# Altium PCB 2008_SablierElectronique_PCB.PcbDoc (part 1 of 2)
Units mm, origin at the board's own origin, x right, y up, seen from the top; angles counter-clockwise.
Board outline 133.25 x 150.25 mm, 2 copper layers (Top Layer, Bottom Layer), stack 1.586 mm thick; 184 components, 217 nets, 656 pads, 372 vias.
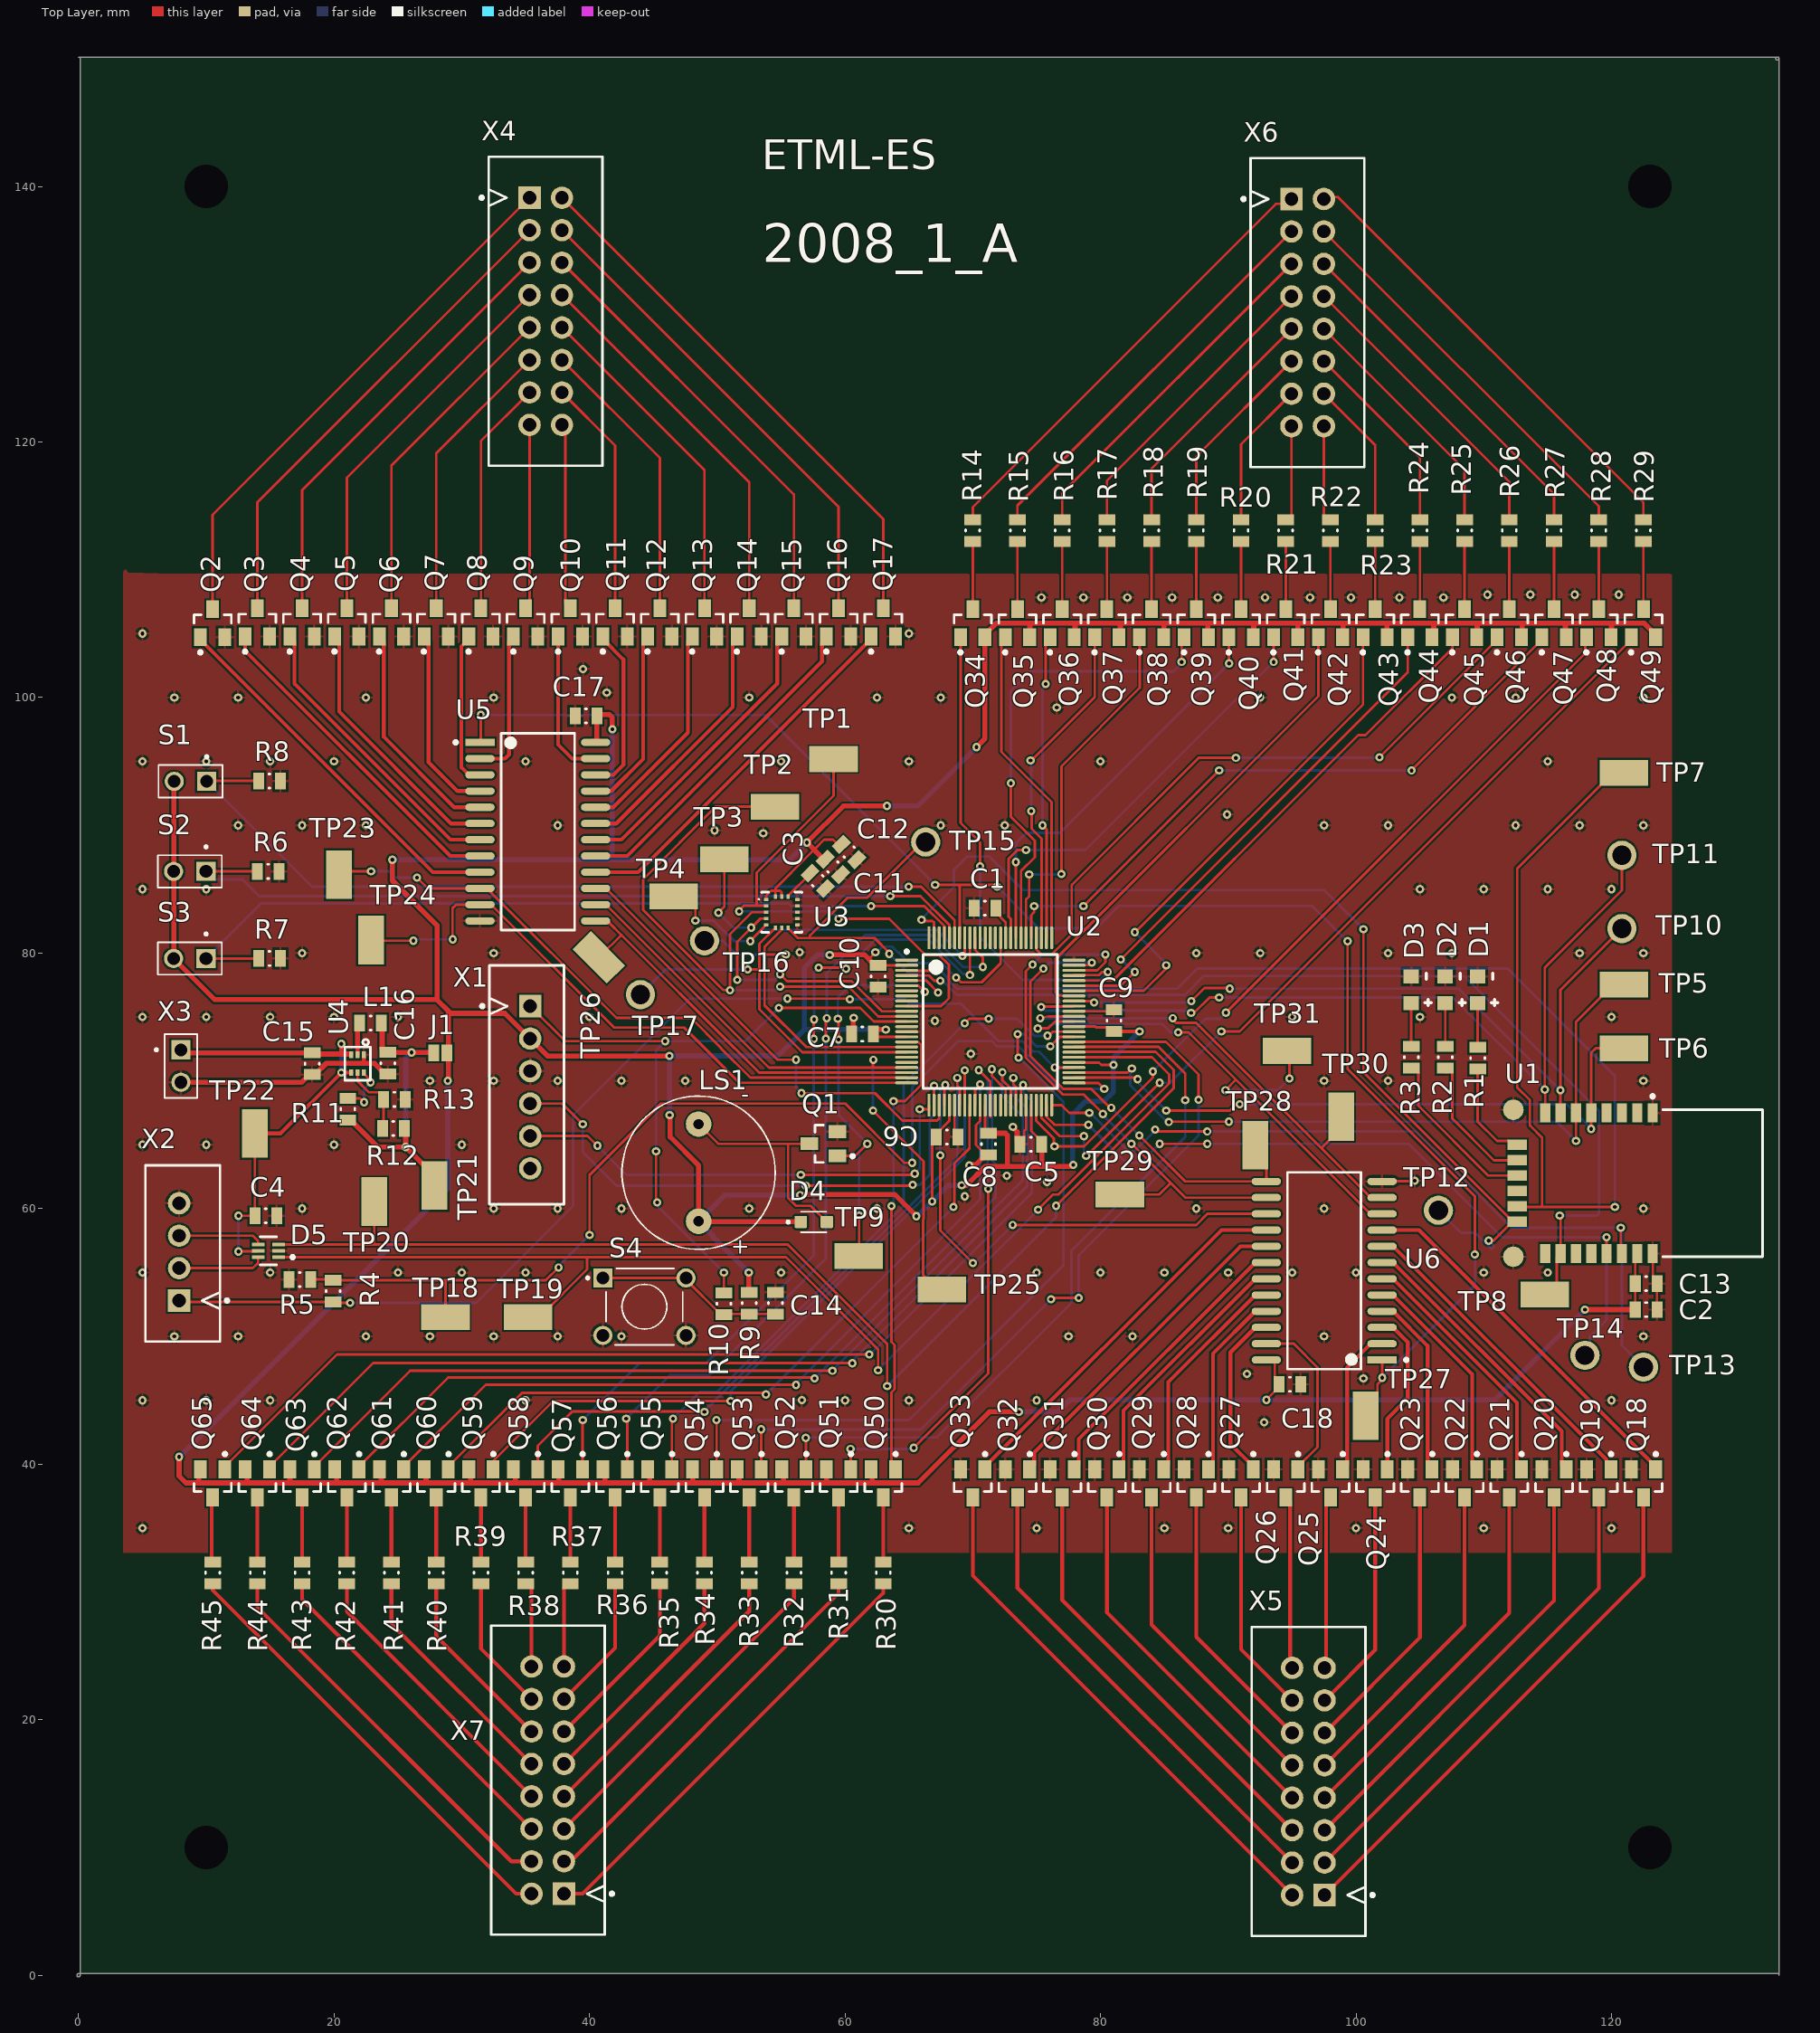
[diagram p0: Top Layer view]
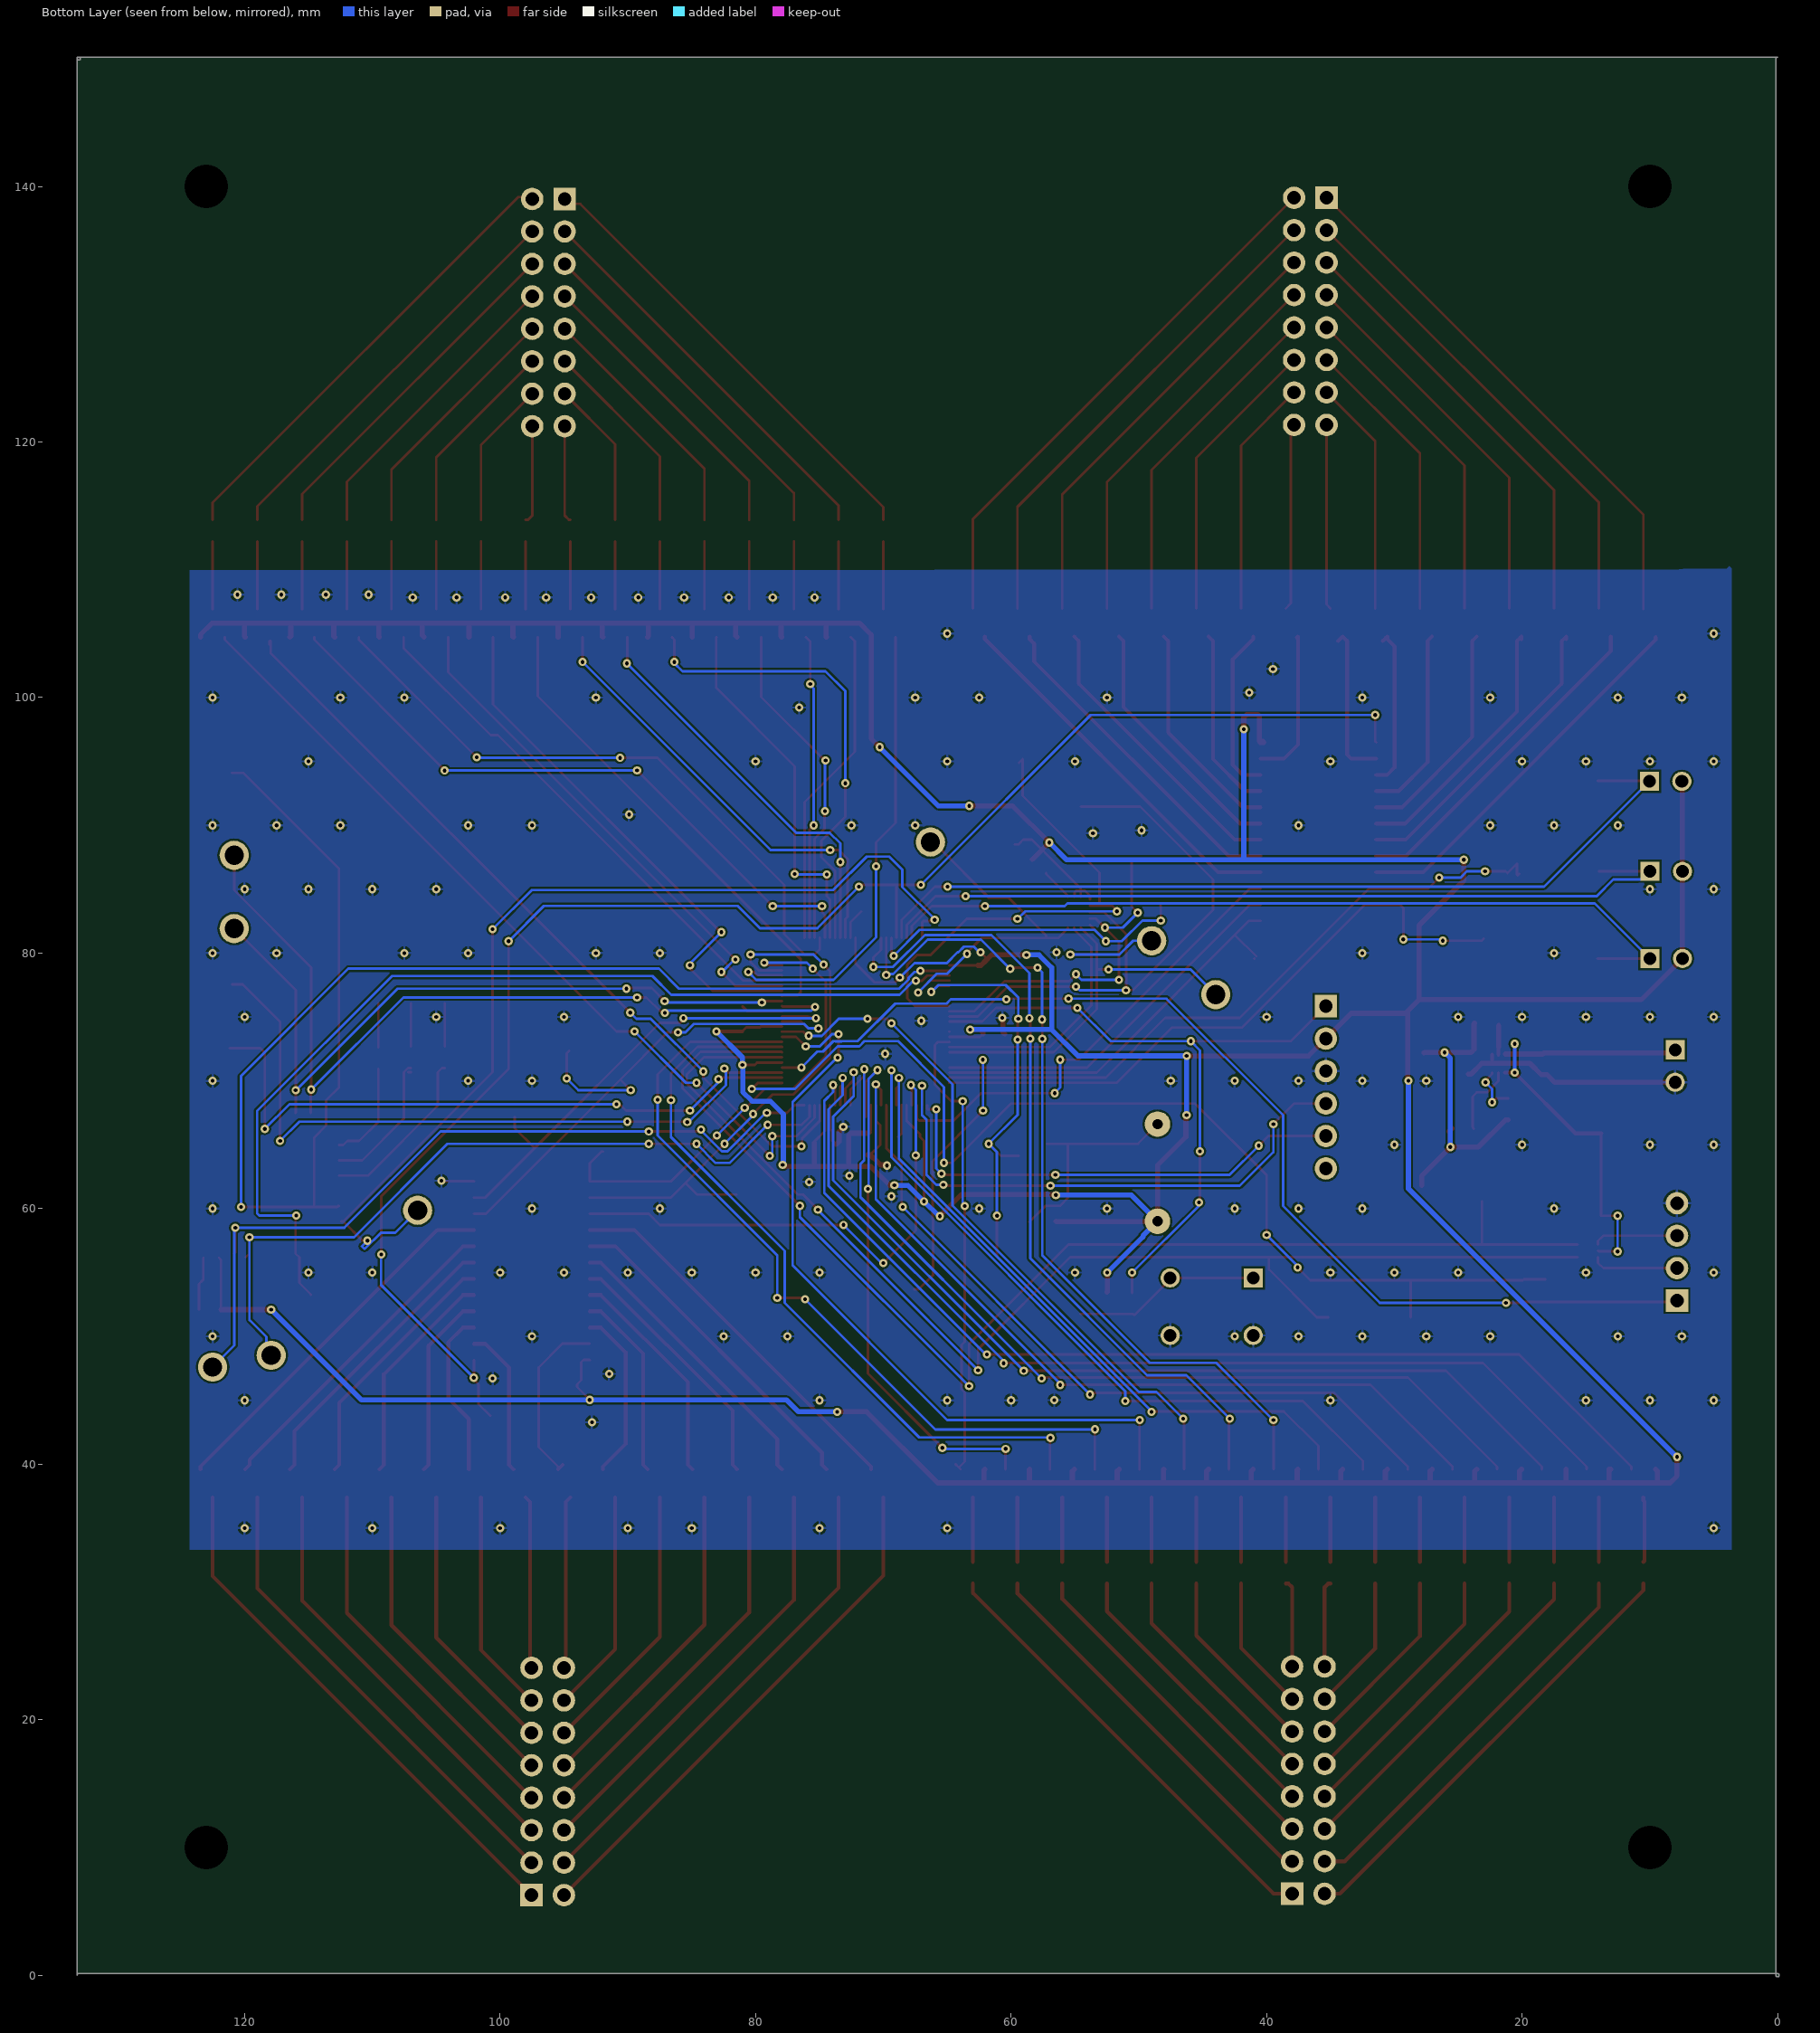
[diagram p1: Bottom Layer view, seen from below]

## Layer stack, top to bottom
Top Solder: solder mask 0.0102, Solder Resist, Dk 3.5
Top Layer: signal copper 0.018
Dielectric1: core 1.55, FR-4, Dk 4.8
Bottom Layer: signal copper 0.018
Bottom Solder: solder mask 0.0102, Solder Resist, Dk 3.5

## Board outline
0,-0.127 cw(c0,0) -0.127,0 cw(c0,0) 0,0.127 133,0.127 cw(c133,0) 133.127,0 133.127,150 ccw(c133,150) 132.998,150.127 ccw(c133,150) 132.914,150.094 cw(c132.95,150) 132.95,150.1 133,150.1 cw(c133,150) 133.1,150 cw(c133,150) 133,149.9 132.95,149.9 cw(c132.95,150) 132.873,149.936 cw(c132.95,150) 132.914,150.094 133,150.127 0,150.127 cw(c0,150) 0,150.127 cw(c0,150) 0.127,150 0.127,149.873 0.127,0.127 0.127,0 cw(c0,0)

## Design rules (kind name [scope] priority, off if disabled: settings)
BoardOutlineClearance [All] p1: gap=0.25 ignorepadtopadclearanceinfootprint=FALSE except(0: Arc-SplitContinuation Track-SplitContinuation SMDPad-SplitContinuation THPad-SplitContinuation Via-SplitContinuation Fill-SplitContinuation Poly-SplitContinuation Region-SplitContinuation Text-SplitContinuation)
Clearance Clearance-xPP-xTP-xTT [All] p1: gap=0.15 ignorepadtopadclearanceinfootprint=FALSE except(0: Arc-Hole Track-Hole SMDPad-Hole THPad-Hole Via-Hole Fill-Hole Poly-Hole Region-Hole Text-Hole)
ComponentClearance [All] p1: gap=0.25 collisioncheckmode=3 verticalgap=0.25 showdistances=FALSE
DiffPairsRouting [All] p1: maxlimit=0.25 minlimit=0.25 mostfreqgap=0.25 toplayer_minwidth=0.381 toplayer_maxwidth=0.381 toplayer_prefwidth=0.381 bottomlayer_minwidth=0.381 bottomlayer_maxwidth=0.381 bottomlayer_prefwidth=0.381 maxuncoupledlength=12.5
Height [All] p1: minheight=0 maxheight=25 prefheight=12.5
HoleSize HoleSize-PTH [All] p1: absolutevalues=TRUE maxlimit=10 minlimit=0.25 maxpercent=80.000 minpercent=20.000
HoleToHoleClearance [All] p1: gap=0.35 allowstackedmicrovias=TRUE
MinimumAnnularRing "Minimum IAR  >0.45mm" [((ObjectKind = 'Pad') OR (ObjectKind = 'Via')) And (Layer = 'MultiLayer') And (HoleDiameter > AsMM(0.45))] p1: minimumring=0.175 // minimum inner annular ring for pads > 0.45mm finished hole size
MinimumAnnularRing "Minimum IAR <=0.45mm" [((ObjectKind = 'Pad') OR (ObjectKind = 'Via')) And (Layer = 'MultiLayer') And (HoleDiameter <= AsMM(0.45))] p2: minimumring=0.175 // minimum inner annular ring for pads <= 0.45mm finished hole size
MinimumSolderMaskSliver [All] p1: minsoldermaskwidth=0.08
PasteMaskExpansion [All] p1: expansion=-0.025
PlaneClearance PlaneClearance-IPI [All] p1: clearance=0.25
PlaneConnect [All] p1: planeconnectstyle=Relief reliefexpansion=0.175 reliefentries=4 reliefconductorwidth=0.2 reliefairgap=0.2
PolygonConnect PolygonConnect-xTW [All] p1: connectstyle=Relief reliefconductorwidth=0.2 reliefentries=4 polygonreliefangle="90 Angle" airgapwidth=0.2
RoutingCorners [All] p1: cornerstyle=45-Degree minsetback=2.5 maxsetback=2.5
RoutingVias RoutingViasES [All] p1: holewidth=0.3 width=0.65 viastyle="Through Hole" minholewidth=0.25 minwidth=0.61 maxholewidth=0.45 maxwidth=0.8 // finishet hole size <= 0.45mm
SilkToSilkClearance [All] p1: silktosilkclearance=0.2
SilkToSolderMaskClearance SilkscreenOverComponentPads [IsPad] p1: minsilkscreentomaskgap=0.2 clearancetoexposedcopper=TRUE
SolderMaskExpansion [All] p1: expansion=0 istentingtop=FALSE
UnRoutedNet [All] p1: checkbadconnections=TRUE
Width Alim [InNetClass('Power')] p1: maxlimit=0.4 minlimit=0.2 preferedwidth=0.3 minimp=50.000000 maximp=50.000000 favimp=50.000000
Width Width-xTW [All] p2: maxlimit=1.5 minlimit=0.2 preferedwidth=0.3 minimp=50.000000 maximp=50.000000 favimp=50.000000
17 further rules are at their usual default settings.

## Classes and differential pairs
net class Power: +5 GND NetC16_2 NetL1_2 VCC
component class 2008_SablierElectronique_MosfetConnections: Q34 Q35 Q36 Q37 Q38 Q39 Q40 Q41 Q42 Q43 Q44 Q45 Q46 Q47 Q48 Q49 Q50 Q51 Q52 Q53 Q54 Q55 Q56 Q57 Q58 Q59 Q60 Q61 Q62 Q63 Q64 Q65 R14 R15 R16 R17 R18 R19 R20 R21 R22 R23 R24 R25 R26 R27 R28 R29 R30 R31 R32 R33 R34 R35 R36 R37 R38 R39 R40 R41 R42 R43 R44 R45 X6 X7
component class 2008_SablierElectronique_Commande_Matrice: C17 C18 Q2 Q3 Q4 Q5 Q6 Q7 Q8 Q9 Q10 Q11 Q12 Q13 Q14 Q15 Q16 Q17 Q18 Q19 Q20 Q21 Q22 Q23 Q24 Q25 Q26 Q27 Q28 Q29 Q30 Q31 Q32 Q33 TP23 TP24 TP25 TP26 TP27 TP28 TP29 TP30 TP31 U5 U6 X4 X5
component class 2008_SablierElectronique_Alim: C15 C16 J1 L1 R11 R12 R13 TP21 TP22 U4 X3
component class 2008_SablierElectronique_SCH: C1 C2 C3 C4 C5 C6 C7 C8 C9 C10 C11 C12 C13 C14 D1 D2 D3 D4 D5 LS1 Q1 R1 R2 R3 R4 R5 R6 R7 R8 R9 R10 S1 S2 S3 S4 TP1 TP2 TP3 TP4 TP5 TP6 TP7 TP8 TP9 TP10 TP11 TP12 TP13 TP14 TP15 TP16 TP17 TP18 TP19 TP20 U1 U3 X1 X2

## Components (designator, comment, footprint, x,y, rotation, side; value= is the part's Value field where it differs from the comment)
C1 "10uF" RESC0805(2012)_L 70.95,83.525 r180 top
C2 "4.7uF" RESC0805(2012)_L 122.707,52.091 r180 top
C3 "10nF" RESC0805(2012)_L 57.861,85.651 r135 top
C4 "100nF" RESC0805(2012)_L 14.656,59.436 r180 top
C5 "100nF" RESC0805(2012)_L 74.549,65.024 r0 top
C6 "100nF" RESC0805(2012)_L 67.984,65.61 r180 top
C7 "100nF" RESC0805(2012)_L 61.353,73.66 r0 top
C8 "100nF" RESC0805(2012)_L 71.222,65.049 r90 top
C9 "100nF" RESC0805(2012)_L 81.051,74.715 r270 top
C10 "100nF" RESC0805(2012)_L 62.586,78.181 r90 top
C11 "100nF" RESC0805(2012)_L 59.055,86.741 r135 top
C12 "10uF" RESC0805(2012)_L 60.32,87.906 r135 top
C13 "100nF" RESC0805(2012)_L 122.707,54.123 r180 top
C14 "100nf" RESC0805(2012)_L 54.559,52.603 r270 top
C15 "10uF" RESC0805(2012)_L 18.288,71.344 r90 top
C16 "22uF" RESC0805(2012)_L 24.217,71.374 r90 top
C17 "100nF" RESC0805(2012)_L 39.726,98.552 r0 top
C18 "100nF" RESC0805(2012)_L 94.818,46.253 r180 top
D1 "KPT-2012SRC-PRV" 0805_LED 109.525,77.119 r270 top
D2 "KPT-2012SRC-PRV" 0805_LED 106.985,77.119 r270 top
D3 "KPT-2012SRC-PRV" 0805_LED 104.322,77.119 r270 top
D4 "SD0805S040S0R1" DIOSC130X200X100-2N 57.556,58.955 r0 top
D5 "USBLC6-2P6" FP-SOT-666-MFG 14.859,56.693 r180 top
J1 "Jumper" Jumper 28.321,72.194 r180 top
L1 "LQM21PN1R0MCHD0" RESC0805(2012)_L 22.86,74.529 r180 top value=1uH
LS1 "CMI-1295IC-0385T" CUI_CMI-1295IC-0385T 48.539,62.814 r180 top
Q1 "Mosfet-N" FAIR-SOT23-3_V 58.305,65.075 r90 top
Q2 "Mosfet-N" FAIR-SOT23-3_V 10.5,105.82 r0 top
Q3 "Mosfet-N" FAIR-SOT23-3_V 14,105.881 r0 top
Q4 "Mosfet-N" FAIR-SOT23-3_V 17.5,105.881 r0 top
Q5 "Mosfet-N" FAIR-SOT23-3_V 21,105.881 r0 top
Q6 "Mosfet-N" FAIR-SOT23-3_V 24.5,105.881 r0 top
Q7 "Mosfet-N" FAIR-SOT23-3_V 28,105.881 r0 top
Q8 "Mosfet-N" FAIR-SOT23-3_V 31.5,105.881 r0 top
Q9 "Mosfet-N" FAIR-SOT23-3_V 35,105.881 r0 top
Q10 "Mosfet-N" FAIR-SOT23-3_V 38.5,105.881 r0 top
Q11 "Mosfet-N" FAIR-SOT23-3_V 42,105.881 r0 top
Q12 "Mosfet-N" FAIR-SOT23-3_V 45.5,105.881 r0 top
Q13 "Mosfet-N" FAIR-SOT23-3_V 49,105.881 r0 top
Q14 "Mosfet-N" FAIR-SOT23-3_V 52.5,105.881 r0 top
Q15 "Mosfet-N" FAIR-SOT23-3_V 56,105.881 r0 top
Q16 "Mosfet-N" FAIR-SOT23-3_V 59.5,105.881 r0 top
Q17 "Mosfet-N" FAIR-SOT23-3_V 63,105.881 r0 top
Q18 "Mosfet-N" FAIR-SOT23-3_V 122.5,38.5 r180 top
Q19 "Mosfet-N" FAIR-SOT23-3_V 119,38.5 r180 top
Q20 "Mosfet-N" FAIR-SOT23-3_V 115.5,38.5 r180 top
Q21 "Mosfet-N" FAIR-SOT23-3_V 112,38.5 r180 top
Q22 "Mosfet-N" FAIR-SOT23-3_V 108.5,38.5 r180 top
Q23 "Mosfet-N" FAIR-SOT23-3_V 105,38.5 r180 top
Q24 "Mosfet-N" FAIR-SOT23-3_V 101.5,38.5 r180 top
Q25 "Mosfet-N" FAIR-SOT23-3_V 98,38.5 r180 top
Q26 "Mosfet-N" FAIR-SOT23-3_V 94.5,38.5 r180 top
Q27 "Mosfet-N" FAIR-SOT23-3_V 91,38.5 r180 top
Q28 "Mosfet-N" FAIR-SOT23-3_V 87.5,38.5 r180 top
Q29 "Mosfet-N" FAIR-SOT23-3_V 84,38.5 r180 top
Q30 "Mosfet-N" FAIR-SOT23-3_V 80.5,38.5 r180 top
Q31 "Mosfet-N" FAIR-SOT23-3_V 77,38.5 r180 top
Q32 "Mosfet-N" FAIR-SOT23-3_V 73.5,38.5 r180 top
Q33 "Mosfet-N" FAIR-SOT23-3_V 70,38.5 r180 top
Q34 "Mosfet P" FAIR-SOT23-3_V 70,105.82 r0 top
Q35 "Mosfet P" FAIR-SOT23-3_V 73.5,105.82 r0 top
Q36 "Mosfet P" FAIR-SOT23-3_V 77,105.82 r0 top
Q37 "Mosfet P" FAIR-SOT23-3_V 80.5,105.82 r0 top
Q38 "Mosfet P" FAIR-SOT23-3_V 84,105.82 r0 top
Q39 "Mosfet P" FAIR-SOT23-3_V 87.5,105.82 r0 top
Q40 "Mosfet P" FAIR-SOT23-3_V 91,105.82 r0 top
Q41 "Mosfet P" FAIR-SOT23-3_V 94.5,105.82 r0 top
Q42 "Mosfet P" FAIR-SOT23-3_V 98,105.82 r0 top
Q43 "Mosfet P" FAIR-SOT23-3_V 101.5,105.82 r0 top
Q44 "Mosfet P" FAIR-SOT23-3_V 105,105.82 r0 top
Q45 "Mosfet P" FAIR-SOT23-3_V 108.5,105.82 r0 top
Q46 "Mosfet P" FAIR-SOT23-3_V 112,105.82 r0 top
Q47 "Mosfet P" FAIR-SOT23-3_V 115.5,105.82 r0 top
Q48 "Mosfet P" FAIR-SOT23-3_V 119,105.82 r0 top
Q49 "Mosfet P" FAIR-SOT23-3_V 122.5,105.82 r0 top
Q50 "Mosfet P" FAIR-SOT23-3_V 63,38.5 r180 top
Q51 "Mosfet P" FAIR-SOT23-3_V 59.5,38.5 r180 top
Q52 "Mosfet P" FAIR-SOT23-3_V 56,38.5 r180 top
Q53 "Mosfet P" FAIR-SOT23-3_V 52.5,38.5 r180 top
Q54 "Mosfet P" FAIR-SOT23-3_V 49,38.5 r180 top
Q55 "Mosfet P" FAIR-SOT23-3_V 45.5,38.5 r180 top
Q56 "Mosfet P" FAIR-SOT23-3_V 42,38.5 r180 top
Q57 "Mosfet P" FAIR-SOT23-3_V 38.5,38.5 r180 top
Q58 "Mosfet P" FAIR-SOT23-3_V 35,38.5 r180 top
Q59 "Mosfet P" FAIR-SOT23-3_V 31.5,38.5 r180 top
Q60 "Mosfet P" FAIR-SOT23-3_V 28,38.5 r180 top
Q61 "Mosfet P" FAIR-SOT23-3_V 24.5,38.5 r180 top
Q62 "Mosfet P" FAIR-SOT23-3_V 21,38.5 r180 top
Q63 "Mosfet P" FAIR-SOT23-3_V 17.5,38.5 r180 top
Q64 "Mosfet P" FAIR-SOT23-3_V 14,38.5 r180 top
Q65 "Mosfet P" FAIR-SOT23-3_V 10.5,38.5 r180 top
R1 "680" RESC0805(2012)_L 109.525,71.78 r90 top
R2 "680" RESC0805(2012)_L 106.985,71.848 r90 top
R3 "680" RESC0805(2012)_L 104.322,71.848 r90 top
R4 "51k" RESC0805(2012)_L 19.939,53.543 r270 top
R5 "100k" RESC0805(2012)_L 17.323,54.458 r180 top
R6 "10k" RESC0805(2012)_L 14.85,86.393 r0 top
R7 "10k" RESC0805(2012)_L 14.95,79.574 r0 top
R8 "10k" RESC0805(2012)_L 14.95,93.472 r0 top
R9 "10k" RESC0805(2012)_L 52.5,52.603 r270 top
R10 "1k" RESC0805(2012)_L 50.521,52.553 r90 top
R11 "1M" RESC0805(2012)_L 21.082,67.788 r90 top
R12 "453k" RESC0805(2012)_L 24.638,66.264 r180 top
R13 "100k" RESC0805(2012)_L 24.726,68.55 r0 top
R14 "680" RESC0805(2012)_L 70,113.07 r270 top
R15 "680" RESC0805(2012)_L 73.5,113.07 r270 top
R16 "680" RESC0805(2012)_L 77,113.07 r270 top
R17 "680" RESC0805(2012)_L 80.5,113.07 r270 top
R18 "680" RESC0805(2012)_L 84,113.07 r270 top
R19 "680" RESC0805(2012)_L 87.5,113.07 r270 top
R20 "680" RESC0805(2012)_L 91,113.07 r270 top
R21 "680" RESC0805(2012)_L 94.5,113.07 r270 top
R22 "680" RESC0805(2012)_L 98,113.07 r270 top
R23 "680" RESC0805(2012)_L 101.5,113.07 r270 top
R24 "680" RESC0805(2012)_L 105,113.07 r270 top
R25 "680" RESC0805(2012)_L 108.5,113.07 r270 top
R26 "680" RESC0805(2012)_L 112,113.07 r270 top
R27 "680" RESC0805(2012)_L 115.5,113.07 r270 top
R28 "680" RESC0805(2012)_L 119,113.07 r270 top
R29 "680" RESC0805(2012)_L 122.5,113.07 r270 top
R30 "680" RESC0805(2012)_L 63,31.5 r90 top
R31 "680" RESC0805(2012)_L 59.5,31.5 r90 top
R32 "680" RESC0805(2012)_L 56,31.5 r90 top
R33 "680" RESC0805(2012)_L 52.5,31.5 r90 top
R34 "680" RESC0805(2012)_L 49,31.5 r90 top
R35 "680" RESC0805(2012)_L 45.5,31.5 r90 top
R36 "680" RESC0805(2012)_L 42,31.5 r90 top
R37 "680" RESC0805(2012)_L 38.5,31.5 r90 top
R38 "680" RESC0805(2012)_L 35,31.5 r90 top
R39 "680" RESC0805(2012)_L 31.5,31.5 r90 top
R40 "680" RESC0805(2012)_L 28,31.5 r90 top
R41 "680" RESC0805(2012)_L 24.5,31.5 r90 top
R42 "680" RESC0805(2012)_L 21,31.5 r90 top
R43 "680" RESC0805(2012)_L 17.5,31.5 r90 top
R44 "680" RESC0805(2012)_L 14,31.5 r90 top
R45 "680" RESC0805(2012)_L 10.5,31.5 r90 top
S1 "Bouton HAUT" "Header 2 pin" 10.033,93.442 r270 top
S2 "Bouton BAS" "Header 2 pin" 9.982,86.393 r270 top
S3 "Bouton H/M/S" "Header 2 pin" 9.982,79.574 r270 top
S4 "FSM4JH" SW_FSM4JH 44.298,52.324 r0 top
TP1 "5019" TESTPOINT_SMD#1 59.1,95.182 r180 top
TP2 "5019" TESTPOINT_SMD#1 54.519,91.452 r0 top
TP3 "5019" TESTPOINT_SMD#1 50.557,87.342 r0 top
TP4 "5019" TESTPOINT_SMD#1 46.6,84.427 r0 top
TP5 "5019" TESTPOINT_SMD#1 120.981,77.543 r0 top
TP6 "5019" TESTPOINT_SMD#1 120.981,72.55 r0 top
TP7 "5019" TESTPOINT_SMD#1 120.981,94.099 r0 top
TP8 "5019" TESTPOINT_SMD#1 114.783,53.273 r0 top
TP9 "5019" TESTPOINT_SMD#1 61.08,56.296 r0 top
TP10 "5019" TESTPOINT_SMD_Via 120.815,81.919 r0 top
TP11 "5019" TESTPOINT_SMD_Via 120.815,87.655 r0 top
TP12 "5019" TESTPOINT_SMD_Via 106.451,59.867 r0 top
TP13 "5019" TESTPOINT_SMD_Via 122.5,47.6 r0 top
TP14 "5019" TESTPOINT_SMD_Via 117.921,48.522 r0 top
TP15 "5019" TESTPOINT_SMD_Via 66.309,88.686 r0 top
TP16 "5019" TESTPOINT_SMD_Via 48.997,80.965 r0 top
TP17 "5019" TESTPOINT_SMD_Via 43.983,76.751 r0 top
TP18 "5019" TESTPOINT_SMD#1 28.727,51.499 r0 top
TP19 "5019" TESTPOINT_SMD#1 35.185,51.499 r180 top
TP20 "5019" TESTPOINT_SMD#1 23.146,60.554 r90 top
TP21 "5019" TESTPOINT_SMD#1 27.858,61.816 r90 top
TP22 "5019" TESTPOINT_SMD#1 13.806,65.885 r90 top
TP23 "5019" TESTPOINT_SMD#1 20.4,86.139 r270 top
TP24 "5019" TESTPOINT_SMD#1 22.892,81.021 r270 top
TP25 "5019" TESTPOINT_SMD#1 67.571,53.68 r0 top
TP26 "5019" TESTPOINT_SMD#2 40.732,79.661 r90 top
TP27 "5019" TESTPOINT_SMD#1 100.765,43.79 r90 top
TP28 "5019" TESTPOINT_SMD#1 92.117,64.971 r270 top
TP29 "5019" TESTPOINT_SMD#1 81.517,61.1 r0 top
TP30 "5019" TESTPOINT_SMD#1 98.855,67.185 r90 top
TP31 "5019" TESTPOINT_SMD#1 94.59,72.35 r0 top
U1 "MCHP-RN4020-MODULE-24" MCHP-MODULE-24_V 117.765,61.988 r270 top
U2 "MC-32B-MX795-SQ100" TQFP-PT100_N 71.374,74.646 r0 top
U3 "STM-L3GD20H-LGA-16_A" STM-LGA-16 55.05,83.202 r0 top
U4 "TLV62585PDRLR" SOT563 21.844,71.344 r270 top
U5 "CD74HCT4067" SOIC24 35.95,89.505 r0 top
U6 "CD74HCT4067" SOIC24 97.511,55.143 r180 top
X1 "ICD" CON6 35.357,75.844 r270 top
X2 "USB" CON4 7.874,52.802 r90 top
X3 "Alimentation" "Header 2 pin" 8.016,72.428 r0 top
X4 "Lignes haut" CON8X8(EDITED) 35.306,139.116 r270 top
X5 "Lignes bas" CON8X8(EDITED) 97.54,6.277 r90 top
X6 "Colonnes haut" CON8X8(EDITED) 94.945,139.014 r270 top
X7 "Colonnes bas" CON8X8(EDITED) 38,6.38 r90 top

## Footprints (in the part's own frame and the unit in brackets; to place one, negate y for a bottom-side part, rotate by r counter-clockwise, add the part's x,y. Pads: shape width x height; smd on the part's side, far side on the other; paste and mask are expansions set on the pad)
0805_LED [mm] "Chip LED, 2-Leads, Body 2.0x1.3mm, IPC Medium Density"
  rect 1.1x1.2 smd: 1(-1.05,0) 2(1.05,0)
  silkscreen extent -1.3,1.09 1.22,1.55, body extent -1,-0.62 1,0.63, height 0.68
CON4 [mm] "2.54mm pitch, 16 pin, header;shrouded"
  rect 1.75x1.75 / inner round 1.75 / far side rect 1.75x1.75 hole 1.05 mask+0: 1(0,0)
  round 1.75 hole 1.05 mask+0: 2(2.54,0) 3(5.08,0) 4(7.62,0)
  silkscreen extent -3.2,-3.88 10.59,2.64
CON6 [mm] "2.54mm pitch, 16 pin, header;shrouded"
  rect 1.75x1.75 / inner round 1.75 / far side rect 1.75x1.75 hole 1.05 mask+0: 1(0,0)
  round 1.75 hole 1.05 mask+0: 2(2.54,0) 3(5.08,0) 4(7.62,0) 5(10.16,0) 6(12.7,0)
  silkscreen extent -3.2,-3.87 15.49,2.64
CON8X8(EDITED) [mm] "2.54mm pitch, 16 pin, header;shrouded"
  rect 1.75x1.75 / inner round 1.75 / far side rect 1.75x1.75 hole 1.05 mask+0: 1(0,0)
  round 1.75 hole 1.05 mask+0: 2(2.54,0) 3(5.08,0) 4(7.62,0) 5(10.16,0) 6(12.7,0) 7(15.24,0) 8(17.78,0) 9(17.78,2.54) 10(15.24,2.54) 11(12.7,2.54) 12(10.16,2.54) 13(7.62,2.54) 14(5.08,2.54) 15(2.54,2.54) 16(0,2.54)
  silkscreen extent -3.2,-3.87 20.98,5.7, body extent -1.37,-1.27 18.95,3.76, height 9.59
CUI_CMI-1295IC-0385T [mm]
  round 2 hole 0.8: N(0,-3.8) P(0,3.8)
  silkscreen extent -6,-6 6,6
DIOSC130X200X100-2N [mm]
  rrect25% 0.99x0.97 smd: A(1.02,0) C(-1.02,0)
  silkscreen extent -2.1,-0.8 1,0.81
FAIR-SOT23-3_V [mm] "SOT23, 3-Leads, Body 2.92x1.3mm, Pitch 0.95mm"
  rect 1x1.4 smd: 1(-0.95,-1.1) 2(0.95,-1.1) 3(0,1.1)
  silkscreen extent -1.46,-2.41 1.46,0.65, body extent -1.46,-0.65 1.46,0.65, height 1.2
FP-SOT-666-MFG [mm]
  rect 0.99x0.3 smd paste+0 mask+0: 1(-0.805,0.5) 2(-0.805,0) 3(-0.805,-0.5) 4(0.805,-0.5) 5(0.805,0) 6(0.805,0.5)
  silkscreen extent -2.02,-1.1 0.65,1.1, body extent -1.4,-0.95 1.4,0.95, height 0.25
"Header 2 pin" [mm]
  rect 1.5x1.5 hole 1: 1(0,0)
  round 1.5 hole 1: 2(0,-2.54)
  silkscreen extent -2.02,-3.77 1.27,1.23
Jumper [mm] "Jumper SMD"
  rect 0.85x1.3 smd paste+0 mask+0.025: 1(-0.508,0)
  rect 0.85x1.3 smd mask+0.025: 2(0.508,0)
MCHP-MODULE-24_V [mm] "Module, 24-Leads, Body 11.5x19.5mm, Pitch 1.2mm"
  rect 1.5x0.8 smd: 1(-5.5,5.45) 2(-5.5,4.25) 3(-5.5,3.05) 4(-5.5,1.85) 5(-5.5,0.65) 6(-5.5,-0.55) 7(-5.5,-1.75) 8(-5.5,-2.95) 17(5.5,-2.95) 18(5.5,-1.75) 19(5.5,-0.55) 20(5.5,0.65) 21(5.5,1.85) 22(5.5,3.05) 23(5.5,4.25) 24(5.5,5.45)
  round 1.6 smd: 9(-5.75,-5.45) 16(5.75,-5.45)
  rect 0.8x1.5 smd: 10(-3,-5.15) 11(-1.8,-5.15) 12(-0.6,-5.15) 13(0.6,-5.15) 14(1.8,-5.15) 15(3,-5.15)
  silkscreen extent -6.92,5.33 5.75,14.05, body extent -5.75,-5.45 5.75,14.05, height 2.3
RESC0805(2012)_L [mm] "Chip Resistor, Body 2.0x1.3mm, IPC High Density"
  rect 0.85x1.3 smd: 1(-0.85,0) 2(0.85,0)
  silkscreen extent -0.05,-0.55 0.05,0.55, body extent -1.1,-0.67 1.1,0.68, height 0.7
SOIC24 [mm]
  rect 2.298x0.567 smd paste+0 mask+0: 1(-4.528,6.985)
  rrect100% 2.298x0.567 smd paste+0 mask+0: 2(-4.528,5.715) 3(-4.528,4.445) 4(-4.528,3.175) 5(-4.528,1.905) 6(-4.528,0.635) 7(-4.528,-0.635) 8(-4.528,-1.905) 9(-4.528,-3.175) 10(-4.528,-4.445) 11(-4.528,-5.715) 12(-4.528,-6.985) 13(4.528,-6.985) 14(4.528,-5.715) 15(4.528,-4.445) 16(4.528,-3.175) 17(4.528,-1.905) 18(4.528,-0.635) 19(4.528,0.635) 20(4.528,1.905) 21(4.528,3.175) 22(4.528,4.445) 23(4.528,5.715) 24(4.528,6.985)
  silkscreen extent -6.55,-7.7 2.88,7.7, body extent -5.93,-7.95 5.93,7.95, height 0.25
SOT563 [mil] "SOT563, 6-Leads, Body 1.6x1.6mm, Pitch 0.5mm"
  rect 20x12 smd: 1(-27.56,19.68) 2(-27.56,0) 3(-27.56,-19.69) 4(27.56,-19.69) 5(27.56,0) 6(27.56,19.68)
  silkscreen extent -75,-39 51,39, body extent -31,-31 32,31, height 22
STM-LGA-16 [mm] "LGA, 16-Leads, Body 3x3mm, Pitch 0.5mm"
  rect 0.35x0.25 smd: 1(-1.225,1) 2(-1.225,0.5) 3(-1.225,0) 4(-1.225,-0.5) 5(-1.225,-1) 9(1.225,-1) 10(1.225,-0.5) 11(1.225,0) 12(1.225,0.5) 13(1.225,1)
  rect 0.25x0.35 smd: 6(-0.5,-1.225) 7(0,-1.225) 8(0.5,-1.225) 14(0.5,1.225) 15(0,1.225) 16(-0.5,1.225)
  silkscreen extent -1.85,-1.58 1.58,1.57, body extent -1.5,-1.5 1.5,1.5, height 1
SW_FSM4JH [mm]
  rect 1.498x1.498 hole 0.99: 1(-3.25,2.25)
  round 1.498 hole 0.99: 2(3.25,2.25) 3(-3.25,-2.25) 4(3.25,-2.25)
  silkscreen extent -4.54,-2.99 3,2.99
TESTPOINT_SMD#1 [mm]
  rect 3.8x2.03 smd: 1(0,0)
  body extent -1.91,-1.02 1.91,1.01, height 2.29
TESTPOINT_SMD#2 [mm]
  rect 3.8x2.03 smd rot 45: 1(0,0)
  body extent -1.91,-1.02 1.91,1.01, height 2.29
TESTPOINT_SMD_Via [mil]
  round 90 hole 59.06: 1(0,0)
TQFP-PT100_N [mm] "Thin QFP, 100-Leads, Body 12x12mm, Pitch 0.4mm, IPC Medium Density"
  oval 1.8x0.24 smd: 1(-6.55,4.8) 2(-6.55,4.4) 3(-6.55,4) 4(-6.55,3.6) 5(-6.55,3.2) 6(-6.55,2.8) 7(-6.55,2.4) 8(-6.55,2) 9(-6.55,1.6) 10(-6.55,1.2) 11(-6.55,0.8) 12(-6.55,0.4) 13(-6.55,0) 14(-6.55,-0.4) 15(-6.55,-0.8) 16(-6.55,-1.2) 17(-6.55,-1.6) 18(-6.55,-2) 19(-6.55,-2.4) 20(-6.55,-2.8) 21(-6.55,-3.2) 22(-6.55,-3.6) 23(-6.55,-4) 24(-6.55,-4.4) 25(-6.55,-4.8) 51(6.55,-4.8) 52(6.55,-4.4) 53(6.55,-4) 54(6.55,-3.6) 55(6.55,-3.2) 56(6.55,-2.8) 57(6.55,-2.4) 58(6.55,-2) 59(6.55,-1.6) 60(6.55,-1.2) 61(6.55,-0.8) 62(6.55,-0.4) 63(6.55,0) 64(6.55,0.4) 65(6.55,0.8) 66(6.55,1.2) 67(6.55,1.6) 68(6.55,2) 69(6.55,2.4) 70(6.55,2.8) 71(6.55,3.2) 72(6.55,3.6) 73(6.55,4) 74(6.55,4.4) 75(6.55,4.8)
  oval 0.24x1.8 smd: 26(-4.8,-6.55) 27(-4.4,-6.55) 28(-4,-6.55) 29(-3.6,-6.55) 30(-3.2,-6.55) 31(-2.8,-6.55) 32(-2.4,-6.55) 33(-2,-6.55) 34(-1.6,-6.55) 35(-1.2,-6.55) 36(-0.8,-6.55) 37(-0.4,-6.55) 38(0,-6.55) 39(0.4,-6.55) 40(0.8,-6.55) 41(1.2,-6.55) 42(1.6,-6.55) 43(2,-6.55) 44(2.4,-6.55) 45(2.8,-6.55) 46(3.2,-6.55) 47(3.6,-6.55) 48(4,-6.55) 49(4.4,-6.55) 50(4.8,-6.55) 76(4.8,6.55) 77(4.4,6.55) 78(4,6.55) 79(3.6,6.55) 80(3.2,6.55) 81(2.8,6.55) 82(2.4,6.55) 83(2,6.55) 84(1.6,6.55) 85(1.2,6.55) 86(0.8,6.55) 87(0.4,6.55) 88(0,6.55) 89(-0.4,6.55) 90(-0.8,6.55) 91(-1.2,6.55) 92(-1.6,6.55) 93(-2,6.55) 94(-2.4,6.55) 95(-2.8,6.55) 96(-3.2,6.55) 97(-3.6,6.55) 98(-4,6.55) 99(-4.4,6.55) 100(-4.8,6.55)
  silkscreen extent -6.67,-5.25 5.25,5.59, body extent -6,-6 6,6, height 1.2

## Part data
C1 C2 C3 C4 C5 C6 C7 C8 C9 C10 C11 C12 C13 C14 C15 C16 C17 C18: library part CAP1206
D4: "Diode Schottky 40V 100mA (DC) Surface Mount 0805 (2012 Metric)", Package="0805 AVX", Supplier Part Number 1=581-SD0805S040S0R5, Arrow_Electronics-Purchase-URL=https://snapeda.com/shop?store=Arrow+Electronics&id=809038, Availability=Good, DigiKey-Purchase-URL=https://snapeda.com/shop?store=DigiKey&id=809038, MF=AVX, Mouser-Purchase-URL=https://snapeda.com/shop?store=Mouser&id=809038, MP=SD0805S040S0R1, Price=None, SnapEDA_Link=https://www.snapeda.com/parts/SD0805S040S0R1/AVX/view-part/809038/?ref=snap, Supplier 1=Mouser
D5: Supplier Part Number 1=511-USBLC6-2P6, Supplier 1=Mouser
J1: library part Jumper_2p
L1: library part 744311100, "LQM21PN1R0MCHD", Supplier Part Number 1=81-LQM21PN1R0MCHD, Manufacturer Part Number=LQM21PN1R0MCHD, PackageReference=LQM21PN1R0MCHD, Supplier 1=Mouser
LS1: "12 mm, 3 Vdc, 85 dB, Through Hole, Driving Circuit, Magnetic Audio Indicator Buzzer", Package=Package, Supplier Part Number 1=490-CMI-1295IC-0385T, Availability=Unavailable, MF="CUI Devices", MP=CMI-1295IC-0385T, Price=None, SnapEDA_Link=https://www.snapeda.com/parts/CMI-1295IC-0385T/CUI%20Devices/view-part/4413411/?ref=snap, Supplier 1=Mouser
Q1 Q2 Q3 Q4 Q5 Q6 Q7 Q8 Q9 Q10 Q11 Q12 Q13 Q14 Q15 Q16 Q17 Q18 Q19 Q20 Q21 Q22 Q23 Q24 Q25 Q26 Q27 Q28 Q29 Q30 Q31 Q32 Q33: library part NEMOS-GSD-3_D
R1 R2 R3 R4 R5 R6 R7 R8 R9 R10 R11 R12 R13 R14 R15 R16 R17 R18 R19 R20 R21 R22 R23 R24 R25 R26 R27 R28 R29 R30 R31 R32 R33 R34 R35 R36 R37 R38 R39 R40 R41 R42 R43 R44 R45: library part RES
S1 S2 S3: library part "Switch SMD", "Switch Surface Mount", Package=None, Availability=Unavailable, MF=C&K, MP="PTS526 SM08 SMTR2 LFS", Price=None, SnapEDA_Link=https://www.snapeda.com/parts/PTS526%20SM08%20SMTR2%20LFS/C&K/view-part/4000306/?ref=snap
S4: "Switch Push Button OFF _ON_ SPST Round Button 0.05A 24VDC Momentary Contact PC Pins Thru-Hole", Contact_Current_Rating="50 mA", Package=None, Supplier Part Number 1=506-FSM4JH, Configuration_Pole-Throw="Single Pole - Single Throw", Digi-Key_Part_Number=450-1650-ND, Digi-Key_Purchase_URL=https://www.digikey.com/product-detail/en/te-connectivity-alcoswitch-switches/1825910-6/450-1650-ND/1632536?utm_source=snapeda&utm_medium=aggregator&utm_campaign=symbol, EU_RoHS_Compliance=Compliant, MF="TE Connectivity", MP=1825910-6, SnapEDA_Link=https://www.snapeda.com/parts/1825910-6/TE%20Connectivity%20ALCOSWITCH%20Switches/view-part/424522/?ref=snap, Supplier 1=Mouser, TE_purchase_URL=https://www.te.com/usa-en/product-1825910-6.html?te_bu=Cor&te_type=disp&te_campaign=seda_glo_cor-seda-global-disp-prtnr-fy19-seda-model-bom-cta_sma-317_1&elqCampaignId=32493
TP1 TP2 TP3 TP4 TP5 TP6 TP7 TP8 TP9 TP18 TP19 TP20 TP21 TP22 TP23 TP24 TP25 TP26 TP27 TP28 TP29 TP30 TP31: library part TESTPOINT, "Test point smd", Supplier Part Number 1=534-5019, Supplier 1=Mouser
TP10 TP11 TP12 TP13 TP14 TP15 TP16 TP17: library part TESTPOINT_via, "Test point smd"
U1: Supplier Part Number 1=579-RN4020-V/RM120, Supplier 1=Mouser
U2: Supplier Part Number 1=579-PIC32MX795F512, Supplier 1=Mouser
U3: Supplier Part Number 1=2762758, Supplier 1=Farnell
U4: "2.5V-5.5V input, 3-A high efficiency step-down converter in 2x2 QFN or SOT563 package 6-SOT-5X3 -40 to 125", Package="SOT-5X3-6 Texas Instruments", Supplier Part Number 1=595-TLV62585PDRLR, Arrow_Electronics-Purchase-URL=https://snapeda.com/shop?store=Arrow+Electronics&id=3229753, Availability=Good, MF="Texas Instruments", Mouser-Purchase-URL=https://snapeda.com/shop?store=Mouser&id=3229753, MP=TLV62585PDRLR, Price=None, SnapEDA_Link=https://www.snapeda.com/parts/TLV62585PDRLR/Texas%20Instruments/view-part/3229753/?ref=snap, Supplier 1=Mouser, Texas_Instruments-Purchase-URL=https://snapeda.com/shop?store=Texas+Instruments&id=3229753
U5 U6: Supplier Part Number 1=595-CD74HC4067M, Supplier 1=Mouser
X1: library part "Header 6 pins"
X2: library part "Header 4 pin"
X3: library part "Header 2 pin", "Connector Header Through Hole 2 position", Package=None, Availability=Unavailable, DigiKey-Purchase-URL=https://snapeda.com/shop?store=DigiKey&id=2390280, EU_RoHS_Compliance=Compliant, MF="TE Connectivity", Mouser-Purchase-URL=https://snapeda.com/shop?store=Mouser&id=2390280, MP=826632-1, Price=None, SnapEDA_Link=https://www.snapeda.com/parts/826632-1/TE%20Connectivity%20AMP%20Connectors/view-part/2390280/?ref=snap
X4 X5 X6 X7: library part "Mâle DIN 8 x 8"

## Free pads (board coordinates)
  round 1.524 hole 3.4 unplated: 2(10,10) 2(10,140) 2(123,10) 2(123,140)

## Via types
v1: diameter 0.65, hole 0.3, Top Layer to Bottom Layer, tented both sides, 237 vias
v2: diameter 0.65, hole 0.3, Top Layer to Bottom Layer, tented top, 134 vias
v3: diameter 0.65, hole 0.3, Top Layer to Bottom Layer, 1 vias

## Nets (pads, with @x,y where several pads share a name; then routed paths per layer and width w, separated by ;. In a path a pad name is that pad's centre, name@x,y a point inside that pad or via, vN(x,y) a via of type N, cw(c..) or ccw(c..) an arc to the next point about the centre after c; other vN are vias at no path point)
+5: C4.2 C15.2 D5.5 TP22.1 U4.3 U4.4 X3.1 | length 38.1
  Top Layer w0.2: v1(12.522,56.642) 12.548,56.667 14.029,56.667 D5.5@14.054,56.693 ; v1(12.522,59.436) C4.2@13.806,59.436 TP22.1@13.806,65.885
  Top Layer w0.3: TP22.1@13.806,65.885 15.815,65.885 v1(20.574,70.644) U4.4@21.344,70.644 ; 20.574,72.098 v1(20.574,72.898)
  Top Layer w0.4: X3.1@8.016,72.428 8.25,72.194 C15.2@18.288,72.194 18.384,72.098 20.574,72.098 U4.3@21.296,72.098
  Bottom Layer w0.2: v1(12.522,56.642) v1(12.522,59.436)
  Bottom Layer w0.3: v1(20.574,70.644) v1(20.574,72.898)
BMatriceON: U2.29 U6.15 | length 41.3
  Top Layer w0.2: v1(67.462,64.16) 67.462,58.286 v1(70.003,55.745) ; U2.29@67.774,68.096 67.774,69.603 v1(67.843,69.672) ; v1(73.127,58.725) 87.5,58.725 88.364,59.588 U6.15@92.983,59.588
  Bottom Layer w0.2: v1(67.462,64.16) 67.462,69.291 v1(67.843,69.672) ; v1(70.003,55.745) 70.147,55.745 v1(73.127,58.725)
"Config IN/OUT": TP27.1 U2.94 U5.1 U6.1 | length 129.2
  Top Layer w0.2: U5.1@31.422,96.49 31.496,96.564 v1(31.496,98.628) ; v1(67.056,85.344) 68.974,85.344 ; U2.94@68.974,81.196 68.974,85.344 ; v1(71.907,85.192) 71.755,85.344 68.974,85.344 ; v1(99.339,80.924) 99.339,70.917 109.296,60.96 v1(109.296,56.413) ; TP27.1@100.765,43.79 101.68,44.705 101.68,46.262 102.039,46.621 U6.1@102.039,48.158
  Bottom Layer w0.2: v1(31.496,98.628) 53.772,98.628 v1(67.056,85.344) ; v1(71.907,85.192) 75.159,81.94 79.654,81.94 81.407,83.693 96.571,83.693 v1(99.339,80.924) ; v1(102.057,46.761) 109.322,54.026 109.322,56.439 v1(109.296,56.413)
GND: C1.2 C2.1 C3.1 C4.1 C5.1 C6.1 C7.1 C8.1 C9.1 C10.1 C11.1 C12.1 C13.1 C14.1 C15.1 C16.1 C17.1 C18.1 D1.1 D2.1 D3.1 D5.2 Q1.2 Q2.2 Q3.2 Q4.2 Q5.2 Q6.2 Q7.2 Q8.2 Q9.2 Q10.2 Q11.2 Q12.2 Q13.2 Q14.2 Q15.2 Q16.2 Q17.2 Q18.2 Q19.2 Q20.2 Q21.2 Q22.2 Q23.2 Q24.2 Q25.2 Q26.2 Q27.2 Q28.2 Q29.2 Q30.2 Q31.2 Q32.2 Q33.2 R5.2 R6.2 R7.2 R8.2 R13.2 S4.3 S4.4 U1.1 U1.9 U1.16 U1.24 U2.15 U2.31 U2.36 U2.45 U2.65 U2.75 U3.9 U3.10 U3.11 U3.12 U3.13 U4.1 U5.12 U6.12 X1.3 X2.4 X3.2 | length 43.3
  Top Layer w0.2: U2.15@64.824,73.846 U2.15@64.832,73.854 ; U2.31@68.574,68.096 68.574,65.87 C6.1@68.834,65.61 ; U2.36@70.574,68.096 70.574,66.858 70.256,66.541 70.256,64.987 C8.1@71.044,64.199 ; C8.1@70.897,63.874 C8.1@71.222,64.199 ; C5.1@73.699,65.024 74.024,65.349 74.024,66.086 74.174,66.236 U2.45@74.174,68.096 ; U2.65@77.916,75.454 U2.65@77.924,75.446 80.641,75.446 C9.1@81.026,75.831 ; U6.12@102.039,62.128 102.064,62.154 104.572,62.154 v1(104.597,62.179) ; U1.24@123.215,56.155 123.232,56.138 123.232,54.448 C13.1@123.557,54.123 C2.1@123.557,52.091
  Top Layer w0.3: 22.344,71.44 U4.1@22.344,72.044
  Top Layer w0.4: X3.2@8.016,69.888 17.457,69.888 18.063,70.494 C15.1@18.288,70.494 18.513,70.494 19.393,71.374 23.192,71.374 23.192,71.324 23.992,70.524 C16.1@24.217,70.524 ; C7.1@60.503,73.66 60.634,73.792 60.634,74.881 v2(60.682,74.928) ; v2(69.725,63.375) 69.772,63.422 70.22,63.422 70.997,64.199 71.044,64.199 C8.1@71.222,64.199 ; v2(73.141,66.403) 73.141,66.336 73.474,66.003 73.474,65.249 C5.1@73.699,65.024
  other v1: 35,45 80,95 92.5,100 75.375,107.831 78.663,107.831 82.1,107.831 85.6,107.831 89.181,107.831 92.879,107.831 96.4,107.831 99.6,107.831 103.4,107.831 106.844,107.831 110.287,108.052 113.64,108.052 117.122,108.052 120.561,108.052
  other v2: 5,35 65,35 75,35 85,35 90,35 100,35 110,35 120,35 92.812,43.282 5,45 10,45 15,45 60,45 65,45 75,45 120,45 56.617,45.009 100.584,46.711 91.465,47.066 7.5,50 12.5,50 22.5,50 27.5,50 32.5,50 37.5,50 42.5,50 77.5,50 82.5,50 97.5,50 122.5,50 5,55 15,55 25,55 30,55 35,55 55,55 75,55 80,55 85,55 90,55 95,55 100,55 110,55 115,55 17.5,60 32.5,60 37.5,60 42.5,60 52.5,60 62.5,60 87.5,60 97.5,60 122.5,60 69.367,60.96 75.808,62.085 72.659,62.568 5,65 10,65 20,65 30,65 27.5,70 32.5,70 37.5,70 42.5,70 47.5,70 97.5,70 102.5,70 122.5,70 69.852,72.109 67.032,74.7 5,75 10,75 15,75 20,75 25,75 40,75 95,75 105,75 120,75 17.5,80 32.5,80 87.5,80 92.5,80 102.5,80 107.5,80 117.5,80 122.5,80 56.44,80.059 5,85 10,85 105,85 110,85 115,85 120,85 53.596,89.381 49.786,89.61 12.5,90 17.5,90 22.5,90 37.5,90 67.5,90 72.5,90 97.5,90 102.5,90 112.5,90 117.5,90 122.5,90 89.905,90.838 5,95 10,95 15,95 20,95 35,95 55,95 65,95 115,95 76.581,99.212 7.5,100 12.5,100 22.5,100 32.5,100 52.5,100 62.5,100 67.5,100 107.5,100 112.5,100 122.5,100 41.351,100.381 39.497,102.235 5,105 65,105
InBC1: Q50.1 U2.17 | length 36.8
  Top Layer w0.2: v1(63.627,60.198) 63.627,49.568 63.872,49.323 63.872,45.866 63.627,45.622 63.627,40.191 Q50.1@64.084,39.734 ; v1(63.79,68.405) 64.686,68.405 65.974,69.693 65.974,72.799 65.735,73.038 64.832,73.038 U2.17@64.824,73.046 ; Q50.1@63.95,39.6 Q50.1@64.084,39.734 ; Q50.1@64.35,40 Q50.1@64.084,39.734
  Bottom Layer w0.2: v1(63.627,60.198) 63.79,60.361 v1(63.79,68.405)
InBC2: Q51.1 U2.38 | length 42.9
  Top Layer w0.2: v1(60.427,41.199) 60.45,41.175 Q51.1@60.45,39.6 ; v1(65.38,41.275) 71.215,47.11 v1(71.215,61.551) ; v1(70.46,70.841) 71.366,69.934 71.366,68.104 U2.38@71.374,68.096 ; 71.382,67.175 U2.38@71.382,68.073
  Bottom Layer w0.2: v1(60.427,41.199) 65.303,41.199 v1(65.38,41.275) ; v1(70.46,70.841) 71.157,70.144 71.157,61.609 v1(71.215,61.551)
InBC3: Q52.1 U2.58 | length 58.9
  Top Layer w0.2: v1(56.921,42.062) 56.95,42.034 Q52.1@56.95,39.6 ; U2.58@77.924,72.646 77.932,72.654 84.543,72.654 86.625,70.571 v1(86.625,68.478)
  Bottom Layer w0.2: v1(56.921,42.062) 56.947,42.088 67.183,42.088 77.725,52.63 77.725,56.696 86.625,65.596 v1(86.625,68.478)
InBC4: Q53.1 U2.59 | length 64.4
  Top Layer w0.2: v1(53.442,42.723) 53.45,42.714 Q53.1@53.45,39.6 ; v1(76.122,52.908) 76.224,53.01 v1(78.3,53.01) ; U2.59@77.924,73.046 85.119,73.046 87.674,70.491 v1(87.674,68.512)
  Bottom Layer w0.2: v1(53.442,42.723) 65.937,42.723 v1(76.122,52.908) ; v1(78.3,53.01) 78.3,56.35 87.674,65.724 v1(87.674,68.512)
InBC5: Q54.1 U2.60 | length 60.8
  Top Layer w0.2: v1(49.936,43.459) 49.95,43.446 Q54.1@49.95,39.6 ; v1(73.508,73.66) 73.508,71.882 v1(73.584,71.806) ; v1(76.073,72.695) 76.824,73.446 U2.60@77.924,73.446
  Bottom Layer w0.2: v1(49.936,43.459) 65.01,43.459 77.104,55.553 77.104,68.336 73.635,71.806 v1(73.584,71.806) ; v1(73.508,73.66) 74.016,73.66 74.981,72.695 v1(76.073,72.695)
InBC6: Q55.1 U2.61 | length 54.7
  Top Layer w0.2: Q55.1@46.45,39.6 46.45,43.478 v1(46.533,43.561) ; v1(69.374,74.503) 69.722,74.851 v1(71.25,74.851) ; v1(75.844,73.533) 75.966,73.533 76.279,73.846 U2.61@77.924,73.846 U2.61@77.932,73.854
  Bottom Layer w0.2: v1(46.533,43.561) 48.616,45.644 49.987,45.644 64.592,60.249 64.592,69.721 v1(69.374,74.503) ; v1@71.291,74.892 v1(71.25,74.851) 73.485,74.851 74.819,73.517 75.828,73.517 v1(75.844,73.533)
InBC7: Q56.1 U2.91 | length 64.2
  Top Layer w0.2: v1(42.875,43.561) 42.875,43.459 42.95,43.385 Q56.1@42.95,39.6 ; v1(58.496,73.304) 58.496,74.828 v1(58.572,74.905) ; U2.91@70.174,81.196 70.182,81.188 70.182,80.25 70.778,79.654 v1(70.778,78.918)
  Bottom Layer w0.2: v1(42.875,43.561) 46.279,46.965 49.352,46.965 58.496,56.109 v1(58.496,73.304) ; v1(58.572,74.905) 58.572,78.435 61.544,81.407 66.751,81.407 69.24,78.918 v1(70.778,78.918)
InBC8: Q57.1 U2.92 | length 66.9
  Top Layer w0.2: Q57.1@39.45,39.6 39.45,43.424 v1(39.472,43.446) ; v1(57.556,73.279) 57.556,74.778 v1(57.582,74.803) ; v1(57.937,78.867) 59.715,78.867 59.731,78.852 59.985,78.852 v1(60.071,78.765) ; v1(69.774,78.283) U2.92@69.774,81.196
  Bottom Layer w0.2: v1(39.472,43.446) 43.956,47.93 49.149,47.93 57.556,56.337 v1(57.556,73.279) ; v1(57.582,74.803) 57.582,78.511 v1(57.937,78.867) ; v1(60.071,78.765) 62.363,81.057 66.543,81.057 69.231,78.369 69.688,78.369 v1(69.774,78.283)
InBC9: Q58.1 U2.32 | length 52.6
  Top Layer w0.2: Q58.1@35.95,39.6 35.95,41.428 38.658,44.136 48.963,44.136 v1(49,44.099) ; v1(68.783,70.231) 68.783,69.622 68.974,69.431 U2.32@68.974,68.096
  Bottom Layer w0.2: v1(49,44.099) 49,44.145 68.783,63.929 v1(68.783,70.231)
InBC10: Q59.1 U2.33 | length 57.4
  Top Layer w0.2: Q59.1@32.45,39.6 32.45,40.222 37.16,44.933 v1(51.054,44.933) ; U2.33@69.374,68.096 v1(69.374,70.815)
  Bottom Layer w0.2: v1(51.054,44.933) 51.054,45.704 69.374,64.025 v1(69.374,70.815)
InBC11: Q60.1 U2.34 | length 56.8
  Top Layer w0.2: Q60.1@28.95,39.6 28.95,39.8 34.725,45.575 53.699,45.575 v1(53.815,45.458) ; v1(68.478,60.122) 68.564,60.207 68.564,63.535 69.744,64.715 69.744,68.066 U2.34@69.774,68.096
  Bottom Layer w0.2: v1(53.815,45.458) v1(68.478,60.122)
InBC12: Q61.1 U2.35 | length 64.9
  Top Layer w0.2: Q61.1@25.45,39.6 25.45,39.8 31.869,46.219 56.143,46.219 v1(56.159,46.203) ; U2.35@70.174,68.096 70.174,69.296 70.582,69.704 v1(70.582,69.721)
  Bottom Layer w0.2: v1(56.159,46.203) 56.159,46.304 70.582,60.726 v1(70.582,69.721)
InBC13: Q62.1 U2.41 | length 72.2
  Top Layer w0.2: Q62.1@21.95,39.6 21.95,39.8 28.928,46.778 57.542,46.778 v1(57.609,46.711) ; v1(71.486,70.911) 71.486,70.398 72.574,69.31 U2.41@72.574,68.096
  Bottom Layer w0.2: v1(57.609,46.711) 58.435,47.536 58.435,47.542 58.772,47.878 58.777,47.878 71.79,60.891 71.79,63.491 71.507,63.774 71.507,70.89 v1(71.486,70.911)
InBC14: Q63.1 U2.42 | length 76.9
  Top Layer w0.2: Q63.1@18.45,39.6 18.45,39.8 25.953,47.303 v1(59.01,47.303) ; v1(72.32,70.669) 72.32,70.063 72.974,69.409 U2.42@72.974,68.096 U2.42@72.982,68.104
  Bottom Layer w0.2: v1(59.01,47.303) 73.925,62.219 73.925,67.197 72.32,68.802 v1(72.32,70.669)
InBC15: Q64.1 U2.43 | length 79.9
  Top Layer w0.2: Q64.1@14.95,39.6 14.95,39.8 23.054,47.904 v1(60.579,47.904) ; v1(73.177,70.231) 73.177,69.735 73.364,69.548 73.364,68.106 U2.43@73.374,68.096
  Bottom Layer w0.2: v1(60.579,47.904) 60.579,48.083 74.275,61.779 74.275,67.787 73.177,68.885 v1(73.177,70.231)
InBC16: Q65.1 U2.44 | length 82.6
  Top Layer w0.2: Q65.1@11.45,39.6 11.45,39.8 20.24,48.59 v1(61.9,48.59) ; U2.44@73.782,68.088 U2.44@73.774,68.096 73.774,69.507 v1(73.939,69.672)
  Bottom Layer w0.2: v1(61.9,48.59) 61.976,48.59 62.052,48.666 74.625,61.239 74.625,68.428 73.939,69.113 v1(73.939,69.672)
InC1: Q34.1 U2.72 | length 38.5
  Top Layer w0.2: Q34.1@69.05,104.72 69.05,90.183 70.574,88.659 v1(70.574,86.792) ; U2.72@77.924,78.246 77.954,78.276 79.877,78.276 80.125,78.524 v1(80.569,78.524)
  Bottom Layer w0.2: v1(70.574,86.792) 70.574,81.22 73.893,77.902 79.947,77.902 v1(80.569,78.524)
InC2: Q35.1 U2.76 | length 25.3
  Top Layer w0.2: Q35.1@72.55,104.72 72.238,104.408 72.238,95.755 76.17,91.823 76.17,81.2 U2.76@76.174,81.196
InC3: Q36.1 U2.77 | length 23.9
  Top Layer w0.2: v1(75.463,89.992) 75.774,89.682 U2.77@75.774,81.196 ; v1(75.717,101.067) 75.717,104.387 Q36.1@76.05,104.72
  Bottom Layer w0.2: v1(75.463,89.992) 75.463,100.691 75.717,100.945 v1(75.717,101.067)
InC4: Q37.1 U2.78 | length 26.1
  Top Layer w0.2: v1(74.524,95.072) 74.553,95.043 79.55,100.04 Q37.1@79.55,104.72 ; v1(74.574,91.11) 74.574,91.075 74.615,91.034 74.615,89.718 75.378,88.956 75.378,81.2 U2.78@75.374,81.196
  Bottom Layer w0.2: v1(74.524,95.072) 74.524,95.098 74.574,95.047 v1(74.574,91.11)
InC5: Q38.1 U2.81 | length 28.7
  Top Layer w0.2: U2.81@74.174,81.196 74.174,84.207 74.422,84.455 v1(74.422,86.157) ; v1(76.937,86.182) 76.937,94.615 83.083,100.762 83.083,104.687 Q38.1@83.05,104.72
  Bottom Layer w0.2: v1(74.422,86.157) 76.911,86.157 v1(76.937,86.182)
InC6: Q39.1 U2.82 | length 37
  Top Layer w0.2: v1(72.974,93.294) 72.974,93.243 72.974,90.671 74.854,88.791 74.854,87.503 73.774,86.423 U2.82@73.774,81.196 ; v1(86.352,102.782) 86.352,104.522 Q39.1@86.55,104.72
  Bottom Layer w0.2: v1(72.974,93.294) 72.974,100.508 74.524,102.057 85.725,102.057 86.411,102.743 86.436,102.743 86.398,102.782 v1(86.352,102.782)
InC7: Q40.1 U2.83 | length 32
  Top Layer w0.2: U2.83@73.374,81.196 73.381,81.203 73.374,81.209 v1(73.374,87.132) ; Q40.1@90.05,104.72 90.05,102.685 v1(90.068,102.667)
  Bottom Layer w0.2: v1(73.374,87.132) 73.374,88.589 74.203,89.417 76.819,89.417 v1(90.068,102.667)
InC8: Q41.1 U2.84 | length 35.3
  Top Layer w0.2: U2.84@72.974,81.196 72.974,82.668 72.799,82.843 72.799,87.37 73.491,88.062 v1(74.168,88.062) ; v1(93.55,102.782) Q41.1@93.55,104.72
  Bottom Layer w0.2: v1(74.168,88.062) 78.83,88.062 v1(93.55,102.782)
InC9: Q42.1 U2.68 | length 37.9
  Top Layer w0.2: U2.68@77.924,76.646 77.894,76.676 76.74,76.676 76.465,76.951 76.465,79.513 97.05,100.098 Q42.1@97.05,104.72
InC10: Q43.1 U2.69 | length 42.3
  Top Layer w0.2: U2.69@77.924,77.046 83.395,77.046 85.141,78.792 v1(85.141,79.046) ; v1(82.677,81.636) 82.728,81.636 100.55,99.458 Q43.1@100.55,104.72
  Bottom Layer w0.2: v1(82.677,81.636) 85.141,79.172 v1(85.141,79.046)
InC11: Q44.1 U2.70 | length 41.2
  Top Layer w0.2: U2.70@77.924,77.446 77.927,77.443 81.596,77.443 v1(82.677,78.524) ; v1(81.585,79.502) 104.05,101.967 Q44.1@104.05,104.72
  Bottom Layer w0.2: v1(81.585,79.502) 81.642,79.502 82.62,78.524 v1(82.677,78.524)
InC12: Q45.1 U2.71 | length 41.3
  Top Layer w0.2: U2.71@77.924,77.846 80.97,77.846 100.178,97.053 100.736,97.053 107.55,103.867 Q45.1@107.55,104.72
InC13: Q46.1 U2.79 | length 49.8
  Top Layer w0.2: U2.79@74.974,81.196 74.982,81.188 74.982,80.285 75.38,79.887 76.168,79.887 77.749,81.468 77.749,85.344 87.69,95.285 90.593,95.285 v1(90.602,95.275) ; v1@101.842,95.312 111.05,104.52 Q46.1@111.05,104.72
  Bottom Layer w0.2: v1(90.602,95.275) 101.778,95.275 v1(101.829,95.326)
InC14: Q47.1 U2.80 | length 51.2
  Top Layer w0.2: U2.80@74.574,81.196 74.574,82.973 74.803,83.202 v1(74.803,83.671) ; v1(78.663,83.671) v1(89.284,94.292) ; v1@104.329,94.299 114.55,104.52 Q47.1@114.55,104.72
  Bottom Layer w0.2: v1(74.803,83.671) v1(78.663,83.671) ; v1(89.284,94.292) 89.292,94.285 v1(104.343,94.285)
InC15: Q48.1 U2.47 | length 63
  Top Layer w0.2: U2.47@74.974,68.096 74.974,66.878 76.355,65.497 76.355,64.92 v1(76.403,64.872) 76.409,64.877 78.713,64.877 84.099,70.264 v1(84.099,70.739) ; v1(89.814,75.336) 117.955,103.477 117.955,104.425 118.05,104.425 Q48.1@118.05,104.131
  Bottom Layer w0.2: v1(84.099,70.739) 88.215,74.854 89.332,74.854 v1(89.814,75.336)
InC16: Q49.1 U2.48 | length 66.1
  Top Layer w0.2: U2.48@75.382,68.088 U2.48@75.374,68.096 75.374,67.098 76.798,65.674 v1(78.696,65.674) ; v1(78.882,64.132) 78.909,64.132 80.233,65.456 80.239,65.456 v1(84.633,69.85) ; v1(89.468,73.862) 90.892,73.862 121.55,104.52 Q49.1@121.55,104.72
  Bottom Layer w0.2: v1(78.696,65.674) 78.696,64.319 v1(78.882,64.132) ; v1(84.633,69.85) 85.457,69.85 v1(89.468,73.862)
L1: TP23.1 U2.24 U5.10 | length 52.6
  Top Layer w0.2: TP23.1@20.218,86.206 20.343,86.081 TP23.1@20.4,86.139 20.4,86.997 21.142,86.255 21.28,86.393 v1(22.9,86.393) ; v1(26.492,85.903) 27.335,85.06 U5.10@31.422,85.06 31.967,85.06 42.109,74.918 47.942,74.918 50.305,72.555 ; 50.292,72.542 52.588,70.246 U2.24@64.824,70.246
  Bottom Layer w0.2: v1(22.9,86.393) 24.318,86.393 24.809,85.903 v1(26.492,85.903)
L2: TP24.1 U2.25 U5.11 | length 50.3
  Top Layer w0.2: TP24.1@23.004,81.133 23.172,80.965 v1(26.214,80.965) ; v1(29.297,81.077) 29.276,81.098 29.276,83.512 29.554,83.79 U5.11@31.422,83.79 32.313,83.79 41.935,74.168 47.405,74.168 51.727,69.846 U2.25@64.824,69.846
  Bottom Layer w0.2: v1(26.214,80.965) 26.326,81.077 v1(29.297,81.077)
L3: TP25.1 U2.22 U5.14 | length 50.7
  Top Layer w0.2: U5.14@40.478,83.79 41.305,83.79 54.049,71.046 62.195,71.046 ; v1(62.195,67.666) 66.148,63.712 66.148,59.172 66.116,59.14 66.116,54.804 67.24,53.68 TP25.1@67.571,53.68 ; v1(62.213,71.647) 62.195,71.629 62.195,71.046 ; U2.22@64.824,71.046 62.195,71.046
  Bottom Layer w0.2: v1(62.195,67.666) 62.195,71.629 v1(62.213,71.647)
L4: TP26.1 U2.23 U5.13 | length 31.7
  Top Layer w0.2: U5.13@40.478,82.52 41.388,82.52 42.65,81.258 51.365,72.542 51.384,72.542 53.281,70.646 U2.23@64.824,70.646 ; TP26.1@40.804,79.736 42.488,81.42 ; TP26.1@40.957,79.574 TP26.1@40.966,79.574
LB1: TP31.1 U2.63 U6.10 | length 45.1
  Top Layer w0.2: v1(75.082,74.092) 75.099,74.108 75.908,74.108 76.446,74.646 U2.63@77.924,74.646 ; v1(86.081,73.787) 86.907,73.787 90.614,70.08 ; v1(89.777,69.275) 90.582,70.08 90.614,70.08 ; TP31.1@94.59,72.35 94.794,72.145 v1(94.794,70.192) ; U6.10@102.039,59.588 101.106,59.588 90.614,70.08
  Bottom Layer w0.2: v1(75.082,74.092) 75.099,74.108 75.861,74.108 76.2,74.447 84.836,74.447 85.496,73.787 v1(86.081,73.787) ; v1(89.777,69.275) 93.877,69.275 v1(94.794,70.192)
LB2: TP30.1 U2.64 U6.11 | length 38.4
  Top Layer w0.2: v1(75.286,74.905) 75.91,75.046 U2.64@77.924,75.046 ; v1(85.649,74.905) 85.725,74.721 85.897,74.549 87.483,74.549 97.241,64.791 ; TP30.1@98.855,67.185 98.855,66.3 97.346,64.791 97.241,64.791 ; U6.11@102.039,60.858 101.173,60.858 97.241,64.791
  Bottom Layer w0.2: v1(75.286,74.905) v1(85.649,74.905)
LB3: TP29.1 U2.73 U6.14 | length 44.6
  Top Layer w0.2: v1(74.676,79.096) 74.157,78.577 74.157,72.045 74.159,72.044 74.159,71.813 77.046,68.925 78.679,68.925 v1(80.192,67.412) ; U2.73@77.924,78.646 77.932,78.654 79.755,78.654 80.387,79.286 v1(80.387,79.887) ; TP29.1@81.517,61.1 84.589,61.1 85.493,62.004 ; v1(82.423,65.075) 85.493,62.004 ; U6.14@92.983,60.858 86.639,60.858 85.493,62.004
  Bottom Layer w0.2: v1(74.676,79.096) 75.467,79.887 v1(80.387,79.887) ; v1(80.192,67.412) 80.264,67.34 80.264,67.234 v1(82.423,65.075)